# Altium PCB RobotCtrl_Core.PcbDoc
Units mil, origin at the board's own origin, x right, y up, seen from the top; angles counter-clockwise.
Board outline 1880 x 1545 mil, 4 copper layers (Top Layer, GND1, GND2, Bottom Layer), stack 23.756 mil thick; 48 components, 127 nets, 372 pads, 174 vias.
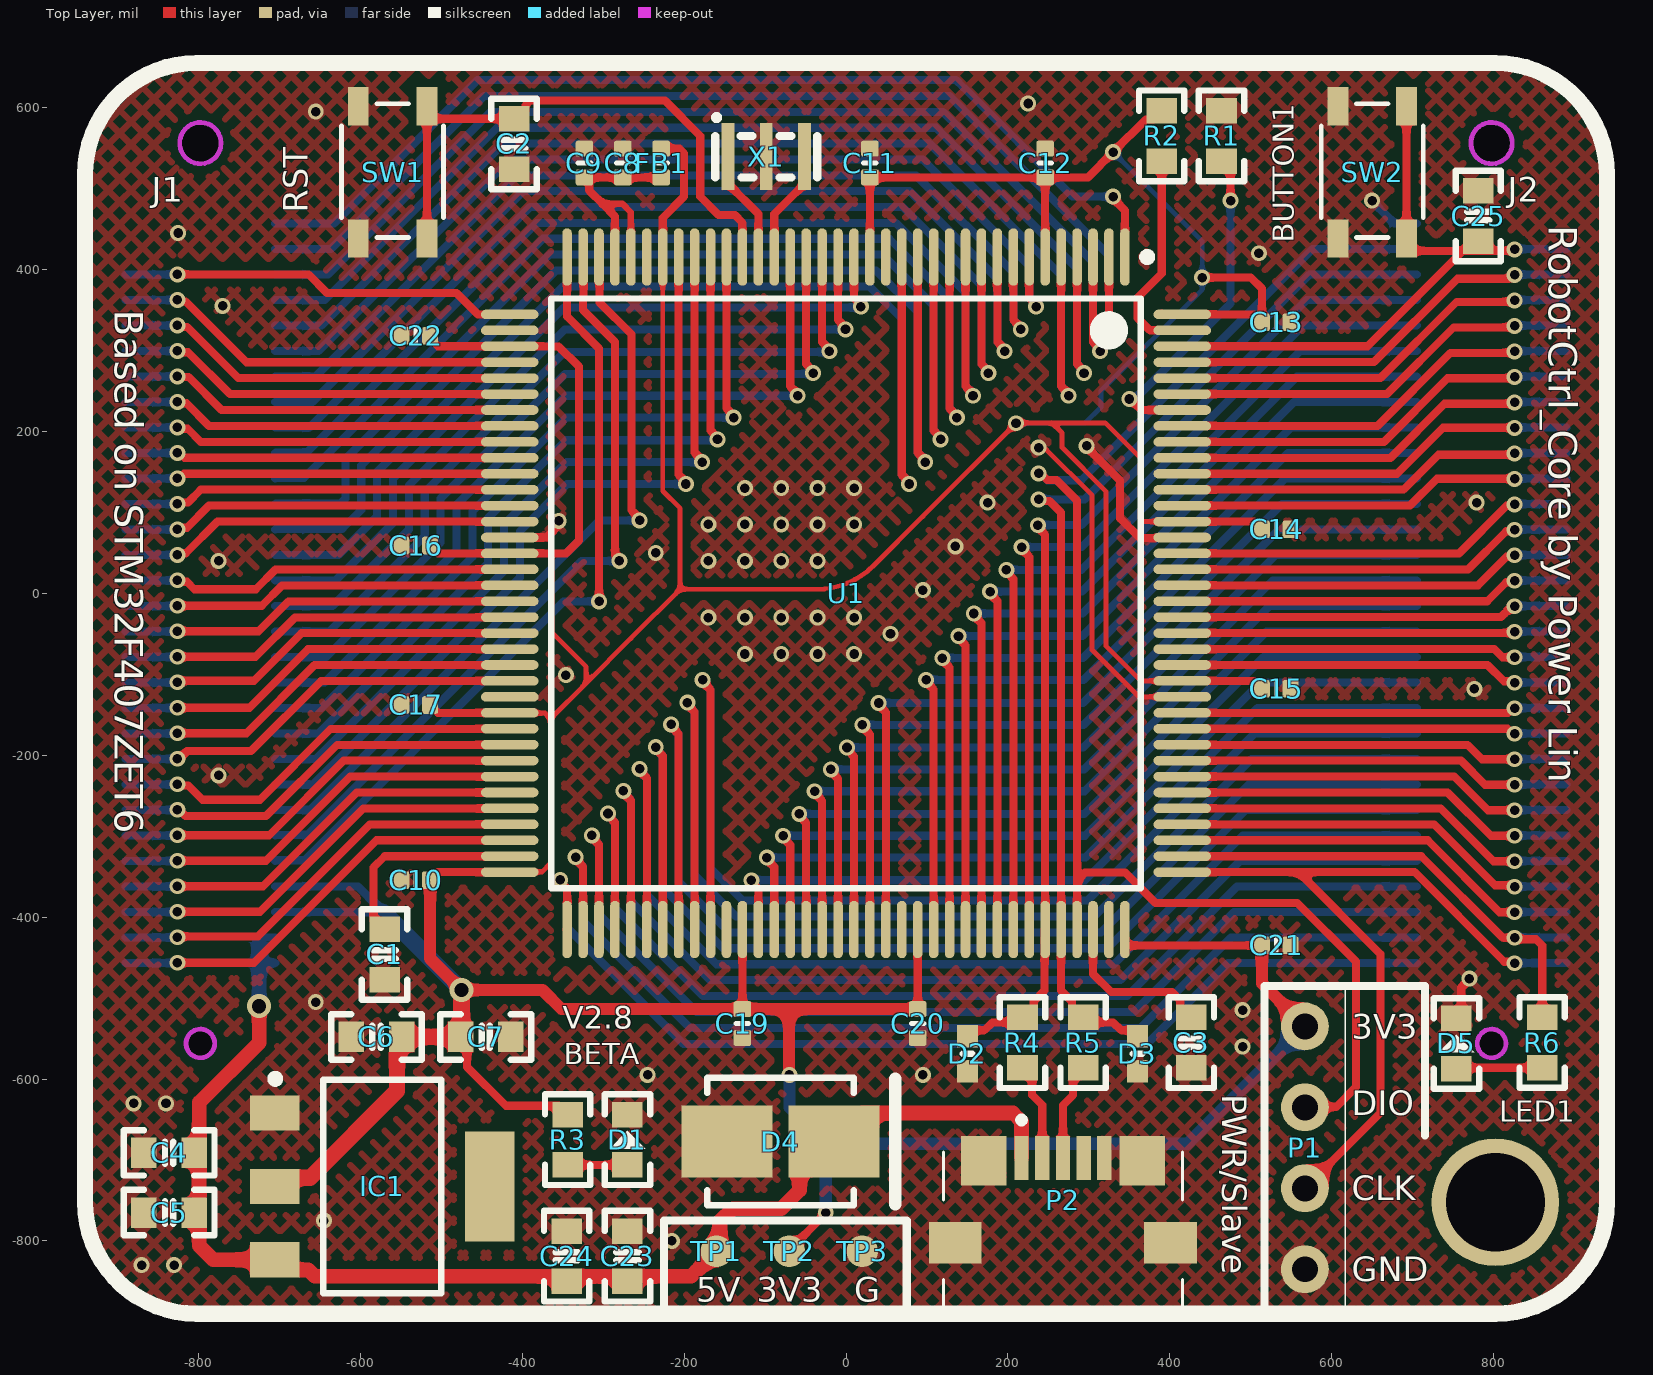
[diagram p0: Top Layer view]
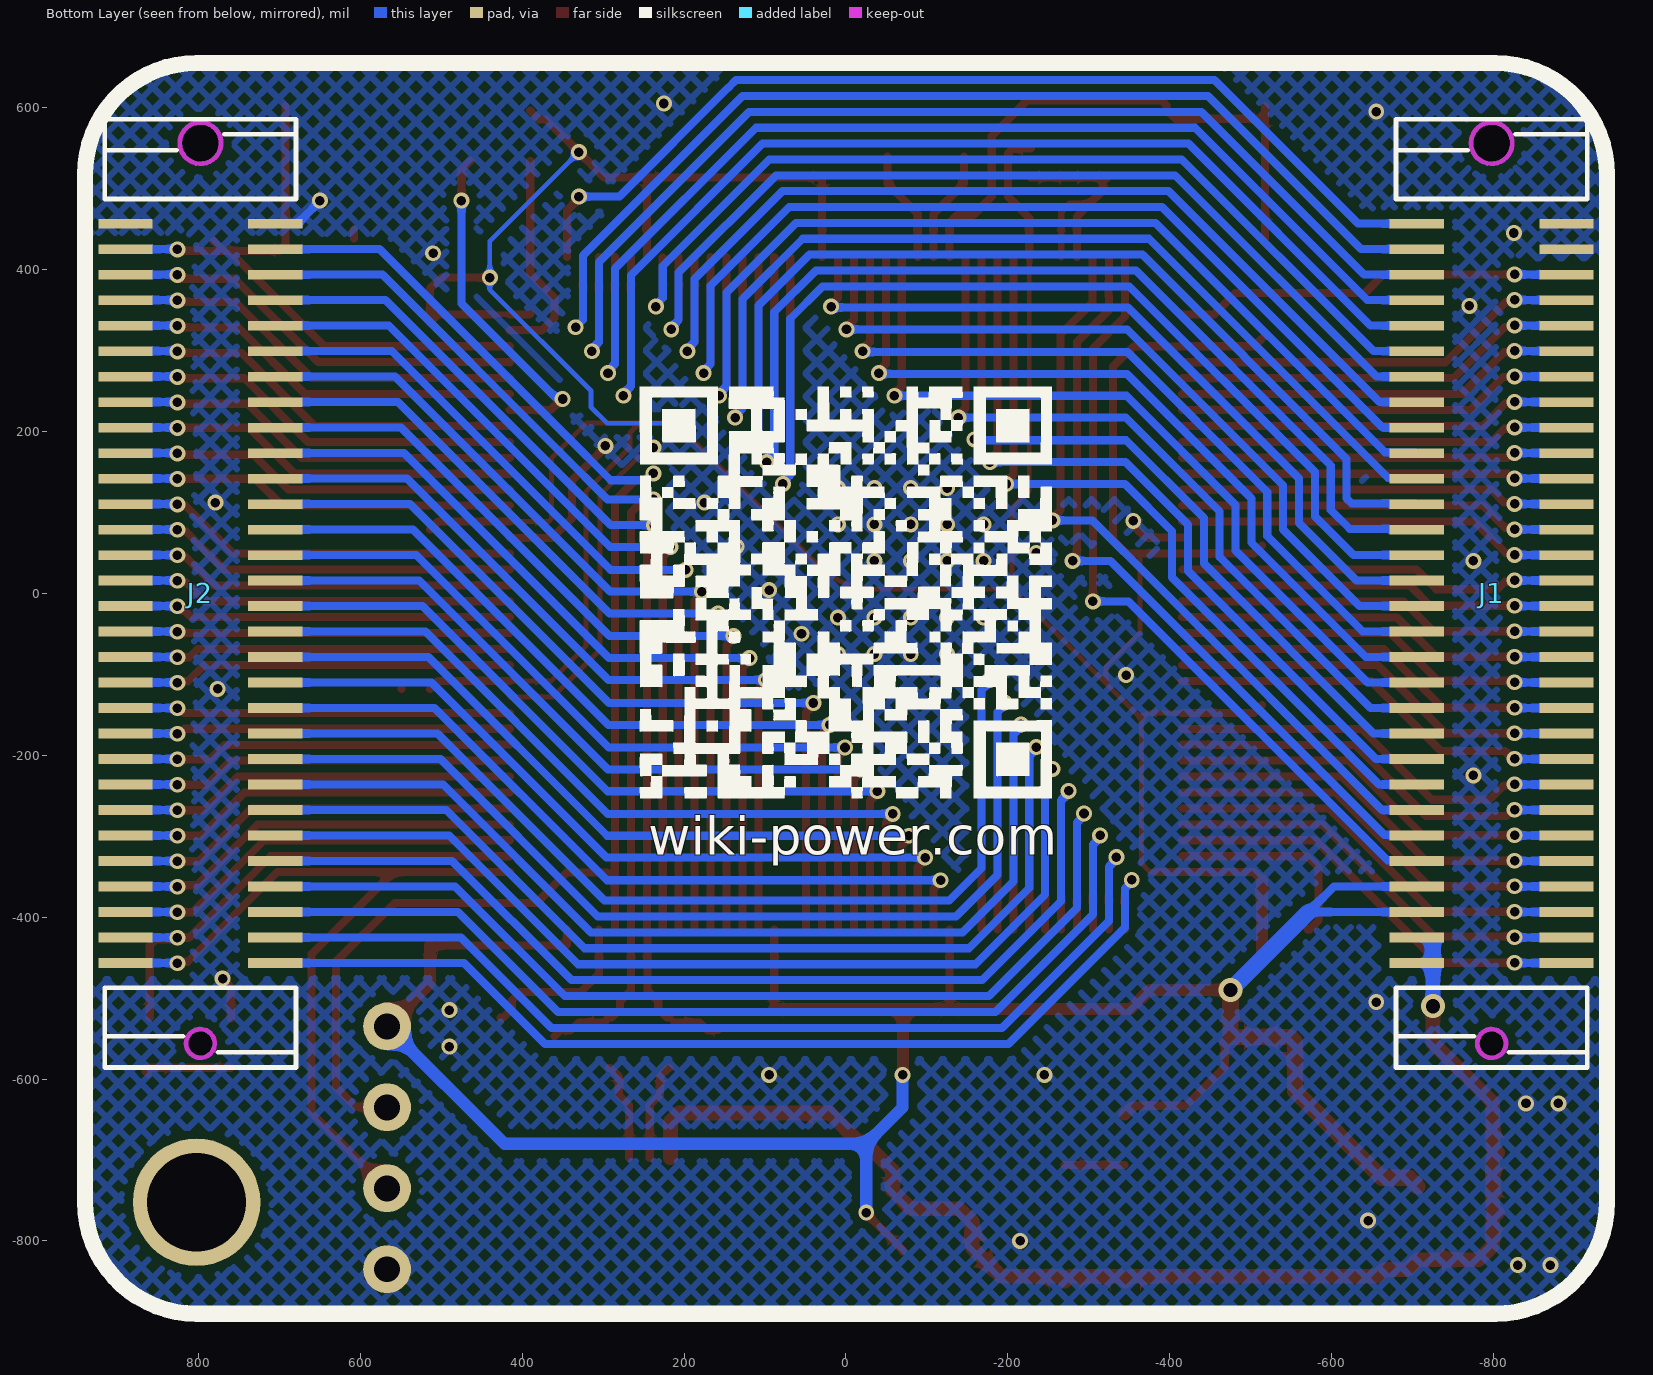
[diagram p1: Bottom Layer view, seen from below]
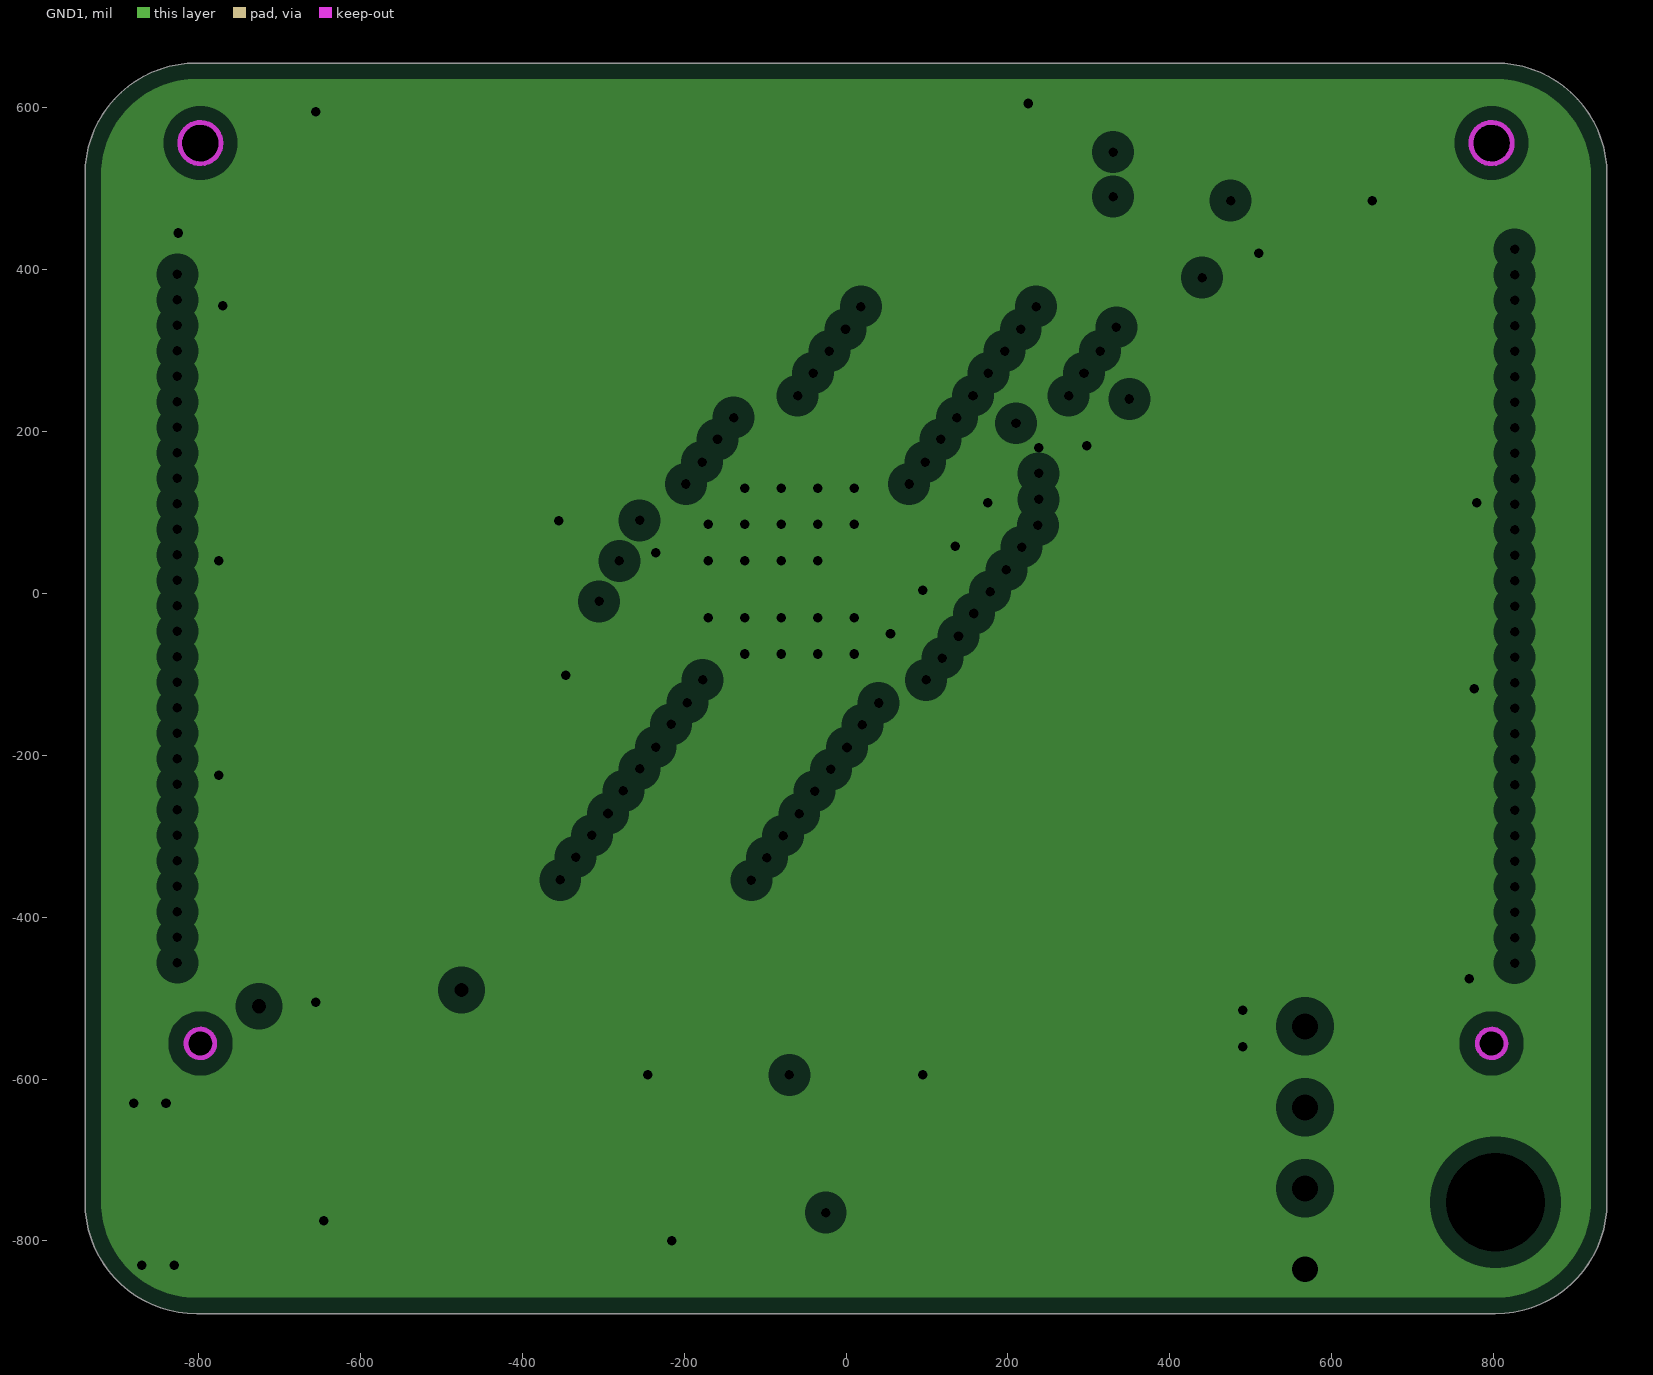
[diagram p2: GND1, clearances drawn from the general rule]
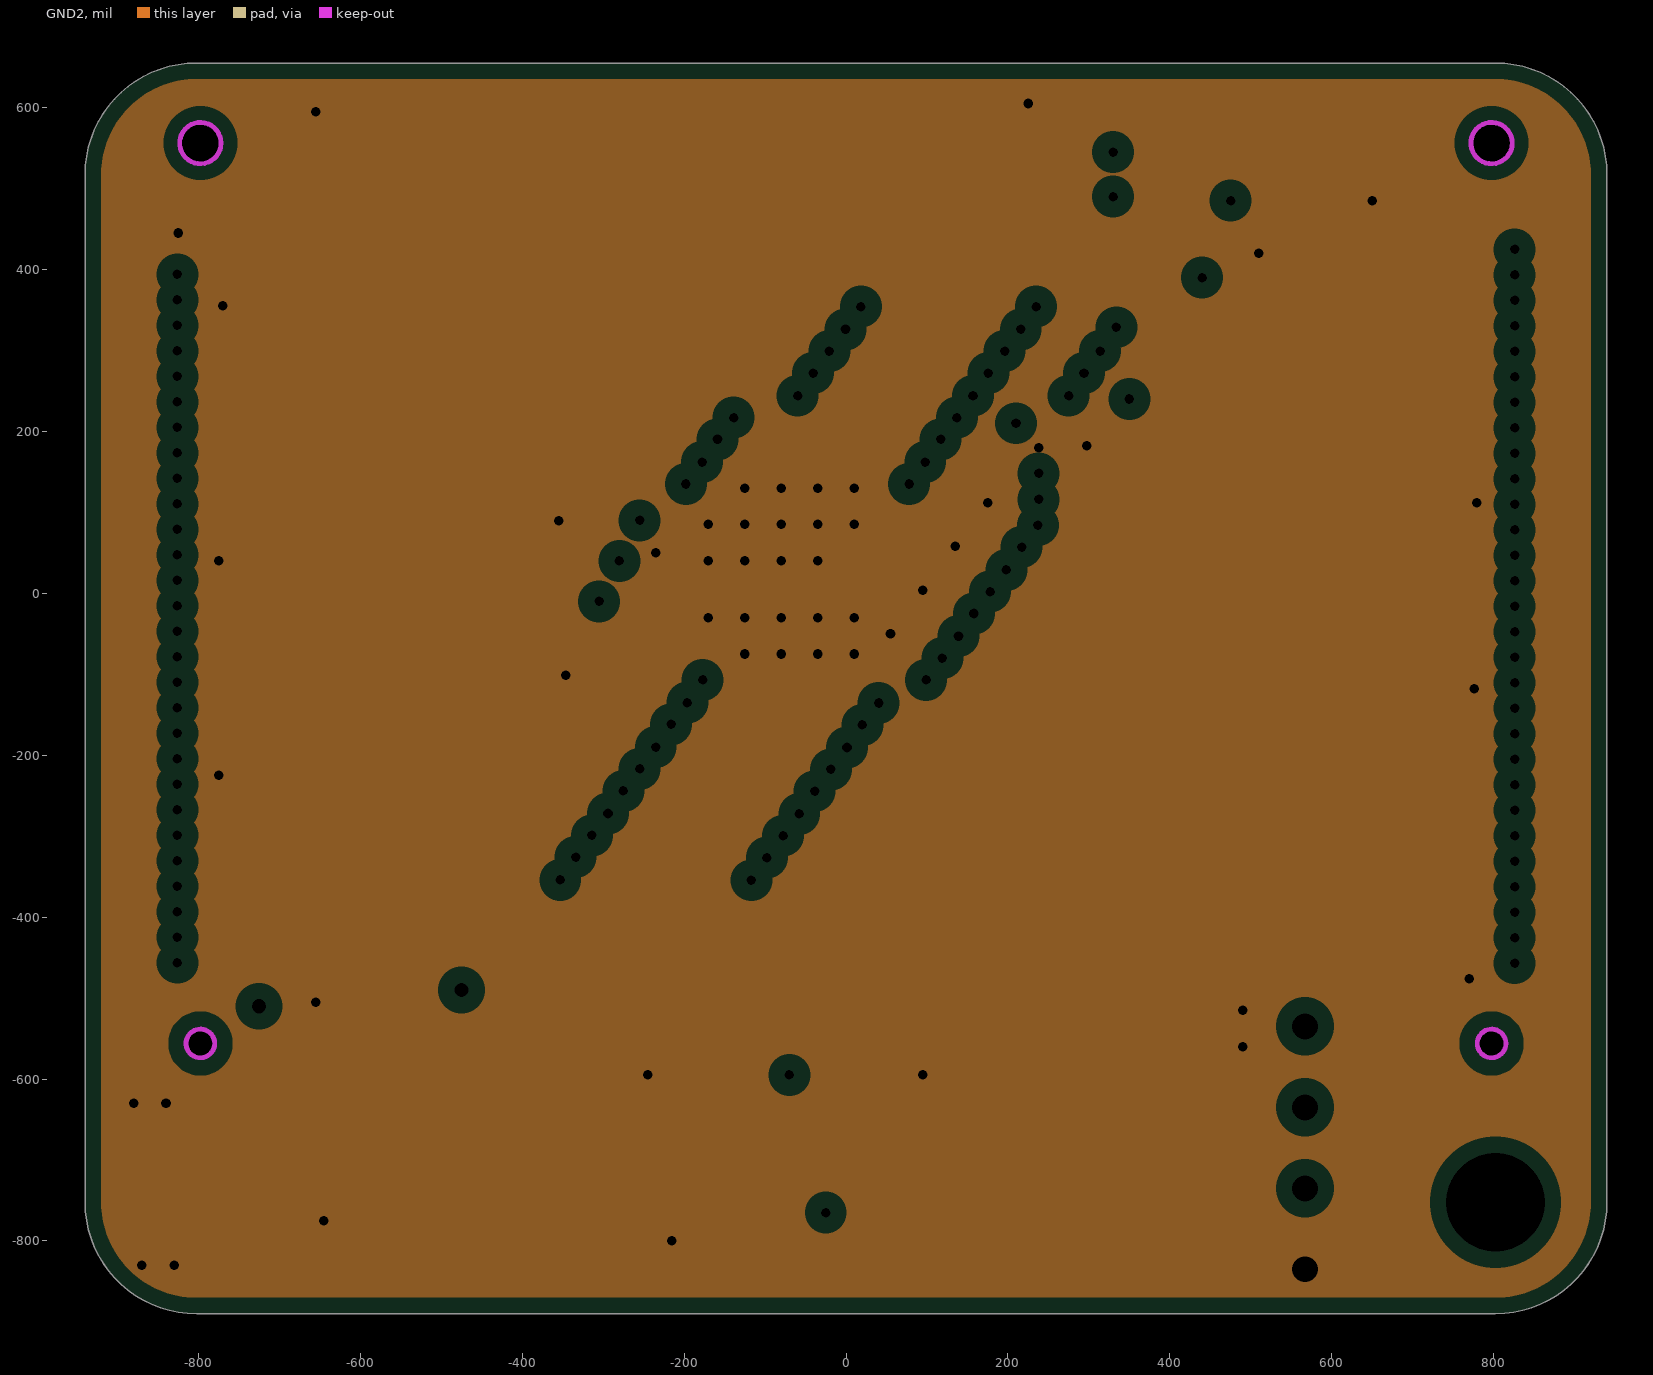
[diagram p3: GND2, clearances drawn from the general rule]
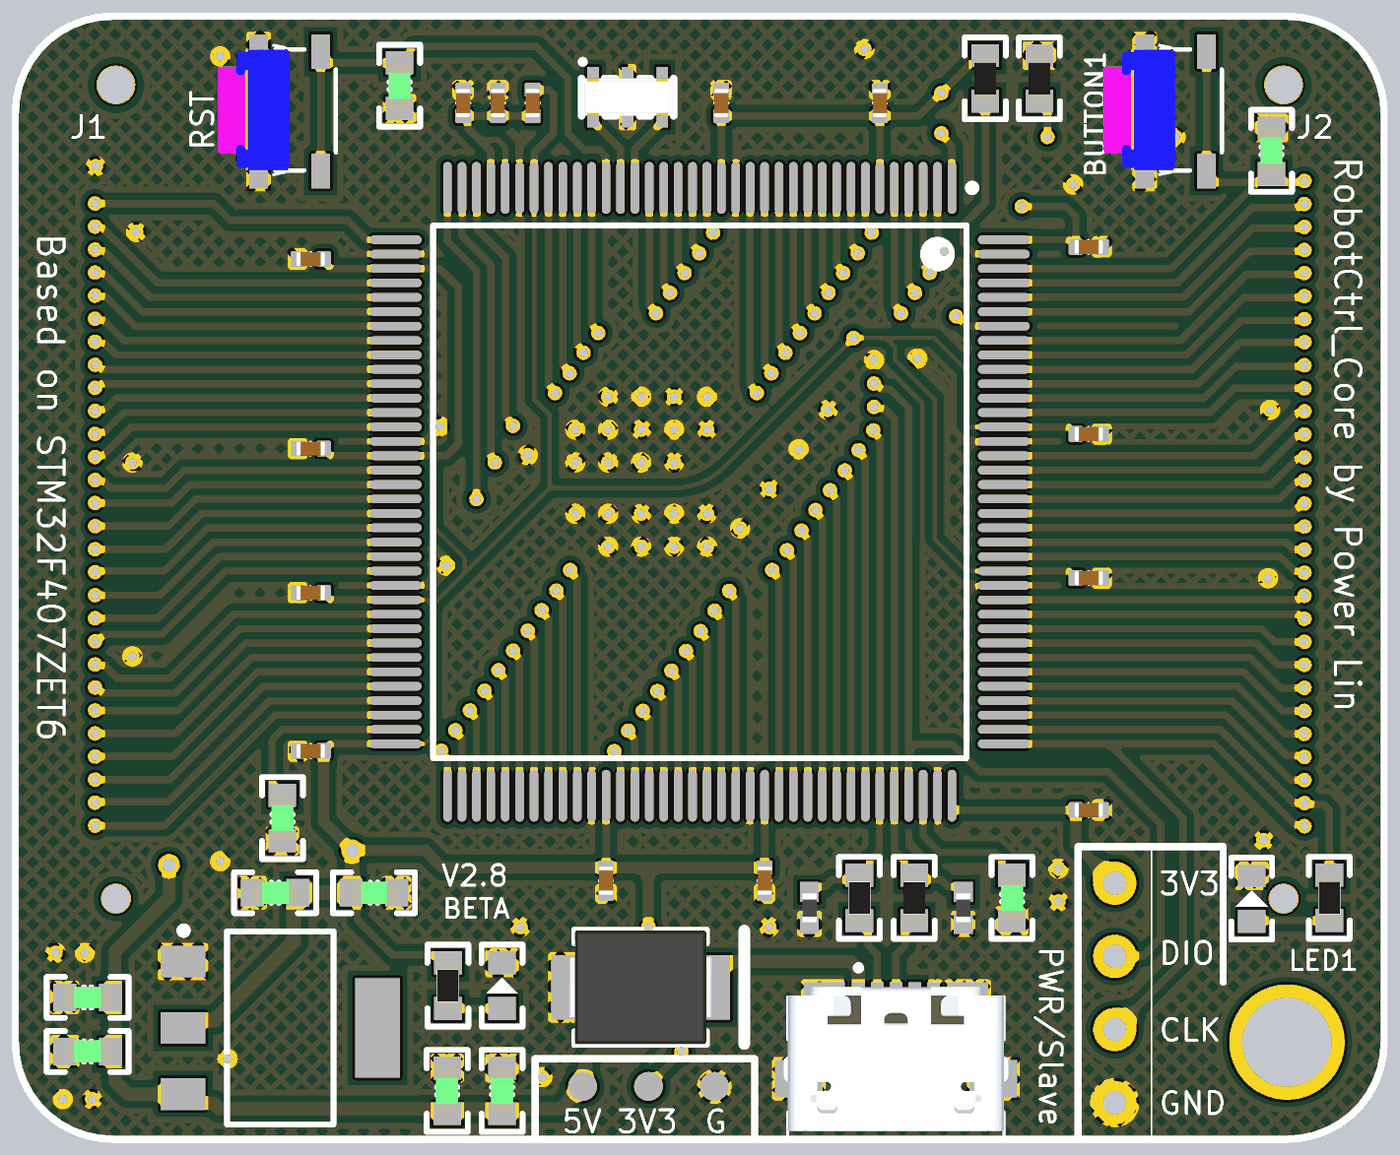
[diagram p4: 3D render of the assembled board from above, using the file's embedded part models]

## Layer stack, top to bottom
Top Solder: solder mask 0.4, Solder Resist, Dk 3.5
Top Layer: signal copper 1.4
Dielectric 2: prepreg 2.8, PP-006, Dk 4.1
GND1: plane copper 1.378, net GND
Dielectric 1: dielectric 12.6, FR-4, Dk 4.8
GND2: plane copper 1.378, net GND
Dielectric 3: prepreg 2.8, PP-006, Dk 4.1
Bottom Layer: signal copper 1.4
Bottom Solder: solder mask 0.4, Solder Resist, Dk 3.5

## Board outline
-802.2,-890 cw(c-802.2,-752.2) -940,-752.2 -940,517.2 cw(c-802.2,517.2) -802.2,655 802.2,655 cw(c802.2,517.2) 940,517.2 940,-752.2 cw(c802.2,-752.2) 802.2,-890
cut-out: 797.48,-575.79 cw(c797.48,-556.1) 777.8,-556.1 cw(c797.48,-556.1) 797.48,-536.42 cw(c797.48,-556.1) 817.17,-556.1 cw(c797.48,-556.1)
cut-out: -797.48,-575.79 cw(c-797.48,-556.1) -817.17,-556.1 cw(c-797.48,-556.1) -797.48,-536.42 cw(c-797.48,-556.1) -777.8,-556.1 cw(c-797.48,-556.1)
cut-out: 797.48,530.51 cw(c797.48,556.1) 771.89,556.1 cw(c797.48,556.1) 797.48,581.69 cw(c797.48,556.1) 823.07,556.1 cw(c797.48,556.1)
cut-out: -797.48,530.51 cw(c-797.48,556.1) -823.07,556.1 cw(c-797.48,556.1) -797.48,581.69 cw(c-797.48,556.1) -771.89,556.1 cw(c-797.48,556.1)

## Design rules (kind name [scope] priority, off if disabled: settings)
Clearance [All] p1: gap=10 ignorepadtopadclearanceinfootprint=FALSE except(0: Arc-Hole Track-Hole SMDPad-Hole THPad-Hole Via-Hole Fill-Hole Poly-Hole Region-Hole Text-Hole; 2: Arc-SMDPad Track-SMDPad SMDPad-SMDPad; 9.6: Arc-Arc Arc-Track Track-Track)
PlaneClearance [All] p1: clearance=20
PlaneConnect [All] p1: planeconnectstyle=Direct reliefexpansion=20 reliefentries=4 reliefconductorwidth=10 reliefairgap=10
PolygonConnect [All] p1: connectstyle=Direct reliefconductorwidth=10 reliefentries=4 polygonreliefangle="90 Angle" airgapwidth=10
RoutingVias [All] p1: holewidth=11.81 width=19.68 viastyle="Through Hole" minholewidth=11.81 minwidth=19.68 maxholewidth=11.81 maxwidth=19.68
SolderMaskExpansion [All] p1: expansion=4 istentingtop=FALSE
Width [All] p1: maxlimit=100 minlimit=6 preferedwidth=10
28 further rules are at their usual default settings.

## Components (designator, comment, footprint, x,y, rotation, side; value= is the part's Value field where it differs from the comment)
C1 "2.2uF" CAP-0603 -570,-446.1 r270 top
C2 "100nF" CAP-0603 -410,555 r90 top
C3 "2.2uF" CAP-0603 426.55,-555.1 r270 top
C4 "10uF" CAP-0603 -836.1,-691.12 r0 top
C5 "100nF" CAP-0603 -836.1,-765 r0 top
C6 "100nF" CAP-0603 -580,-547.99 r0 top
C7 "10uF" CAP-0603 -445,-547.99 r180 top
C8 "1uF" CAP-0402 -275.65,531.46 r270 top
C9 "100nF" CAP-0402 -323.06,531.46 r270 top
C10 "10uF" CAP-0402 -531.46,-354.28 r0 top
C11 "100nF" CAP-0402 29.53,531.46 r270 top
C12 "100nF" CAP-0402 246.06,531.46 r270 top
C13 "100nF" CAP-0402 531.46,334.7 r180 top
C14 "100nF" CAP-0402 531.46,79 r180 top
C15 "100nF" CAP-0402 531.46,-118 r180 top
C16 "100nF" CAP-0402 -531.46,59 r0 top
C17 "100nF" CAP-0402 -531.46,-138 r0 top
C19 "100nF" CAP-0402 -127.95,-531.46 r90 top
C20 "100nF" CAP-0402 88.58,-531.46 r90 top
C21 "100nF" CAP-0402 531.46,-435 r180 top
C22 "100nF" CAP-0402 -531.46,318 r0 top
C23 "10uF" CAP-0603 -270,-818.9 r270 top
C24 "100nF" CAP-0603 -345,-818.9 r270 top
C25 "100nF" CAP-0603 781,466 r270 top
D1 "RED" LED-0603 -270,-675 r90 top
D2 "PESD0402-140" D-0402 150,-568.78 r90 top
D3 "PESD0402-140" D-0402 360,-568.78 r90 top
D4 "SMBJ5.0CA" DO-214AA/SMB -80.94,-677.29 r180 top
D5 "RED" LED-0603 754,-556.1 r90 top
FB1 "120R@100MHz" CAP-0402 -228.23,531.46 r270 top
IC1 "AMS1117-3.3" SOT-223 -580,-756.7 r270 top
J1 "3710M060037G3FT01" 3710M060037G3FT01 -704.96,-456.69 r0 bottom locked
J2 "3710M060037G3FT01" 3710M060037G3FT01 890,-456.69 r0 bottom locked
P1 "HDR1x4_2.54" HDR1X4_2.54 566.91,-835 r180 top
P2 "MicroQTJ" USB-MICRO 268,-775.25 r0 top
R1 "10k" R-0603 463.88,565 r270 top
R2 "120R" R-0603 390,565 r270 top
R3 "4.7k" R-0603 -343.88,-675 r90 top
R4 "10R" R-0603 218,-555.1 r270 top
R5 "10R" R-0603 293,-555.1 r270 top
R6 "4.7k" R-0603 860,-555 r90 top
SW1 "KEY" KEY-4P-4.2*3.4*2.5 -560,520 r270 top
SW2 "KEY" KEY-4P-4.2*3.4*2.5 650,520 r270 top
TP1 "TestPoint" TestPoint -160,-812.71 r90 top
TP2 "TestPoint" TestPoint -70,-812.71 r90 top
TP3 "TestPoint" TestPoint 20,-812.71 r90 top
U1 "STM32F407ZET6" STM-LQFP144_N 0,0 r270 top locked
X1 "8MHz" SMD3213-3P -98.5,539.29 r0 top

## Footprints (in the part's own frame and the unit in brackets; to place one, negate y for a bottom-side part, rotate by r counter-clockwise, add the part's x,y. Pads: shape width x height; smd on the part's side, far side on the other; paste and mask are expansions set on the pad)
3710M060037G3FT01 [mm]
  rect 1.7x0.3 smd: 1(-4.7,0) 2(-4.7,-0.8) 3(-4.7,-1.6) 4(-4.7,-2.4) 5(-4.7,-3.2) 6(-4.7,-4) 7(-4.7,-4.8) 8(-4.7,-5.6) 9(-4.7,-6.4) 10(-4.7,-7.2) 11(-4.7,-8) 12(-4.7,-8.8) 13(-4.7,-9.6) 14(-4.7,-10.4) 15(-4.7,-11.2) 16(-4.7,-12) 17(-4.7,-12.8) 18(-4.7,-13.6) 19(-4.7,-14.4) 20(-4.7,-15.2) 21(-4.7,-16) 22(-4.7,-16.8) 23(-4.7,-17.6) 24(-4.7,-18.4) 25(-4.7,-19.2) 26(-4.7,-20) 27(-4.7,-20.8) 28(-4.7,-21.6) 29(-4.7,-22.4) 30(-4.7,-23.2) 31(0,-23.2) 32(0,-22.4) 33(0,-21.6) 34(0,-20.8) 35(0,-20) 36(0,-19.2) 37(0,-18.4) 38(0,-17.6) 39(0,-16.8) 40(0,-16) 41(0,-15.2) 42(0,-14.4) 43(0,-13.6) 44(0,-12.8) 45(0,-12) 46(0,-11.2) 47(0,-10.4) 48(0,-9.6) 49(0,-8.8) 50(0,-8) 51(0,-7.2) 52(0,-6.4) 53(0,-5.6) 54(0,-4.8) 55(0,-4) 56(0,-3.2) 57(0,-2.4) 58(0,-1.6) 59(0,-0.8) 60(0,0)
  Keep-Out Layer circle w0.152: c-2.35,-25.725 r0.65
  Keep-Out Layer circle w0.152: c-2.35,2.525 r0.45
  silkscreen extent -5.35,-26.47 0.65,3.27
CAP-0402 [mm]
  rrect25% 0.5x0.55 smd: 1(-0.45,0) 2(0.45,0)
  silkscreen extent 0,-0.2 0,0.2, body extent -0.5,-0.25 0.5,0.25, height 0.6
CAP-0603 [mm]
  rect 0.8x0.96 smd: 1(-0.79,0) 2(0.79,0)
  silkscreen extent -1.42,-0.71 1.42,0.71, body extent -0.76,-0.39 0.76,0.39, height 0.9
D-0402 [mm]
  rect 0.7x0.65 smd: 1(-0.55,0) 2(0.55,0)
  silkscreen extent 0,-0.15 0,0.15, body extent -0.5,-0.25 0.5,0.25, height 0.43
DO-214AA/SMB [mm]
  rect 2.85x2.25 smd: 1(1.675,0) 2(-1.675,0)
  silkscreen extent -3.6,-2 2.3,2, body extent -2.5,-1.97 2.5,1.97, height 2.44
HDR1X4_2.54 [mm]
  round 1.5 hole 0.813: 1(0,0) 2(0,-2.54) 3(0,-5.08) 4(0,-7.62)
  silkscreen extent -1.27,-8.89 1.27,1.27
KEY-4P-4.2*3.4*2.5 [mm] "SKRPABE010"
  rect 1.2x0.65 smd: 1(-2.075,1.075) 1(2.075,1.075) 2(-2.075,-1.075) 2(2.075,-1.075)
  silkscreen extent -2.15,-1.6 2.05,1.6, body extent -2.35,-1.6 2.25,1.6, height 2.5
LED-0603 [mm]
  rect 0.8x0.96 smd: 1(-0.79,0) 2(0.79,0)
  silkscreen extent -1.42,-0.71 1.42,0.71, body extent -0.81,-0.4 0.81,0.4, height 0.6
R-0603 [mm]
  rect 0.8x0.96 smd: 1(-0.79,0) 2(0.79,0)
  silkscreen extent -1.42,-0.71 1.42,0.71, body extent -0.76,-0.38 0.76,0.38, height 0.41
SMD3213-3P [mm]
  rect 0.4x2.1 smd: 1(-1.2,0) 2(0,0) 3(1.2,0)
  silkscreen extent -1.6,-0.65 1.6,1.27, body extent -1.6,-0.65 1.6,0.65, height 0.7
SOT-223 [mm]
  rect 1.1x1.55 smd: 1(-2.91,-3.197) 2(-0.61,-3.197) 3(1.69,-3.197)
  rect 3.45x1.55 smd: 4(-0.61,3.553)
  silkscreen extent -4.11,-3.3 2.74,2.03, body extent -3.88,-3.38 2.62,3.58, height 1.7
STM-LQFP144_N [mm] "Thin QFP, 144-Leads, Body 20x20mm, Pitch 0.5mm, IPC Medium Density"
  oval 1.8x0.3 smd: 1(-10.55,8.75) 2(-10.55,8.25) 3(-10.55,7.75) 4(-10.55,7.25) 5(-10.55,6.75) 6(-10.55,6.25) 7(-10.55,5.75) 8(-10.55,5.25) 9(-10.55,4.75) 10(-10.55,4.25) 11(-10.55,3.75) 12(-10.55,3.25) 13(-10.55,2.75) 14(-10.55,2.25) 15(-10.55,1.75) 16(-10.55,1.25) 17(-10.55,0.75) 18(-10.55,0.25) 19(-10.55,-0.25) 20(-10.55,-0.75) 21(-10.55,-1.25) 22(-10.55,-1.75) 23(-10.55,-2.25) 24(-10.55,-2.75) 25(-10.55,-3.25) 26(-10.55,-3.75) 27(-10.55,-4.25) 28(-10.55,-4.75) 29(-10.55,-5.25) 30(-10.55,-5.75) 31(-10.55,-6.25) 32(-10.55,-6.75) 33(-10.55,-7.25) 34(-10.55,-7.75) 35(-10.55,-8.25) 36(-10.55,-8.75) 73(10.55,-8.75) 74(10.55,-8.25) 75(10.55,-7.75) 76(10.55,-7.25) 77(10.55,-6.75) 78(10.55,-6.25) 79(10.55,-5.75) 80(10.55,-5.25) 81(10.55,-4.75) 82(10.55,-4.25) 83(10.55,-3.75) 84(10.55,-3.25) 85(10.55,-2.75) 86(10.55,-2.25) 87(10.55,-1.75) 88(10.55,-1.25) 89(10.55,-0.75) 90(10.55,-0.25) 91(10.55,0.25) 92(10.55,0.75) 93(10.55,1.25) 94(10.55,1.75) 95(10.55,2.25) 96(10.55,2.75) 97(10.55,3.25) 98(10.55,3.75) 99(10.55,4.25) 100(10.55,4.75) 101(10.55,5.25) 102(10.55,5.75) 103(10.55,6.25) 104(10.55,6.75) 105(10.55,7.25) 106(10.55,7.75) 107(10.55,8.25) 108(10.55,8.75)
  oval 0.3x1.8 smd: 37(-8.75,-10.55) 38(-8.25,-10.55) 39(-7.75,-10.55) 40(-7.25,-10.55) 41(-6.75,-10.55) 42(-6.25,-10.55) 43(-5.75,-10.55) 44(-5.25,-10.55) 45(-4.75,-10.55) 46(-4.25,-10.55) 47(-3.75,-10.55) 48(-3.25,-10.55) 49(-2.75,-10.55) 50(-2.25,-10.55) 51(-1.75,-10.55) 52(-1.25,-10.55) 53(-0.75,-10.55) 54(-0.25,-10.55) 55(0.25,-10.55) 56(0.75,-10.55) 57(1.25,-10.55) 58(1.75,-10.55) 59(2.25,-10.55) 60(2.75,-10.55) 61(3.25,-10.55) 62(3.75,-10.55) 63(4.25,-10.55) 64(4.75,-10.55) 65(5.25,-10.55) 66(5.75,-10.55) 67(6.25,-10.55) 68(6.75,-10.55) 69(7.25,-10.55) 70(7.75,-10.55) 71(8.25,-10.55) 72(8.75,-10.55) 109(8.75,10.55) 110(8.25,10.55) 111(7.75,10.55) 112(7.25,10.55) 113(6.75,10.55) 114(6.25,10.55) 115(5.75,10.55) 116(5.25,10.55) 117(4.75,10.55) 118(4.25,10.55) 119(3.75,10.55) 120(3.25,10.55) 121(2.75,10.55) 122(2.25,10.55) 123(1.75,10.55) 124(1.25,10.55) 125(0.75,10.55) 126(0.25,10.55) 127(-0.25,10.55) 128(-0.75,10.55) 129(-1.25,10.55) 130(-1.75,10.55) 131(-2.25,10.55) 132(-2.75,10.55) 133(-3.25,10.55) 134(-3.75,10.55) 135(-4.25,10.55) 136(-4.75,10.55) 137(-5.25,10.55) 138(-5.75,10.55) 139(-6.25,10.55) 140(-6.75,10.55) 141(-7.25,10.55) 142(-7.75,10.55) 143(-8.25,10.55) 144(-8.75,10.55)
  silkscreen extent -10.67,-9.25 9.25,9.58, body extent -10,-10 10,10, height 1.6
TestPoint [mm]
  round 1 smd: 1(0,0)
USB-MICRO [mm]
  rect 0.45x1.38 smd: 1(-1.3,1.975) 2(-0.65,1.975) 3(0,1.975) 4(0.65,1.975) 5(1.3,1.975)
  rect 1.65x1.3 smd: EH(-3.375,-0.685) EH(3.375,-0.685)
  rect 1.425x1.55 smd: EH(-2.487,1.89) EH(2.487,1.89)
  silkscreen extent -3.75,-2.84 3.75,3.26, body extent -3.9,-2.5 3.9,2.5, height 2.72

## Part data
C1 C2 C3 C4 C5 C6 C7 C8 C9 C10 C11 C12 C13 C14 C15 C16 C17 C19 C20 C21 C22 C23 C24 C25: library part CAP, "贴片电容", Package=0402, SuppliersPartNumber=C52923, ComponentLink1Description=供应商链接, ComponentLink1URL=http://www.szlcsc.com/product/details_53938.html, Supplier=LC
D1 D5: library part LED, "发光二极管", Package=0603, SuppliersPartNumber=C2290, ComponentLink1Description=供应商链接, ComponentLink1URL=http://www.szlcsc.com/product/details_2663.html, Supplier=LC
D2 D3: library part TVS_C
D4: library part TVS_C, "Brightking / MDD"
FB1: library part BEAD, "BLM15AG121SN1D", Package=0402, SuppliersPartNumber=C32041, ComponentLink1Description=供应商链接, ComponentLink1URL=http://www.szlcsc.com/product/details_33003.html, Supplier=LC
IC1: library part AMS1117, "AMS1117-3.3 1.0A", Manufacturer_Name=Nexperia, Manufacturer_Part_Number=SI2302DS, Mouser Part Number=N/A, RS Part Number=7983053P, Datasheet Link=https://assets.nexperia.com/documents/data-sheet/SI2302DS.pdf, Height=1.1mm, Mouser Price/Stock=https://www.mouser.com/Search/Refine.aspx?Keyword=N%2FA, RS Price/Stock=http://uk.rs-online.com/web/p/products/7983053P
J1 J2: library part 3710M/F, "B2B Connector", System=Connector
P1: "Header"
P2: library part USB_MICRO, "USB_MICRO"
R1 R2 R3 R4 R5 R6: library part RES, "贴片电阻", Package=0805, SuppliersPartNumber=C17798, Supplier=LC
SW1 SW2: "按键开关"
TP1 TP2 TP3: "测试点"
U1: "ARM Cortex-M4 32-bit MCU+FPU, 210 DMIPS, 512 kB Flash, 192 kB Internal RAM, 114 I/Os, 144-pin LQFP, -40 to 85 degC, Tray", I/Os (High Current)=114, Manufacturer=STMicroelectronics, Operating Frequency(F) (Processor speed) (MHz)=168, Supplier Part Number 1=497-11903-ND, Supply Voltage(Vcc) max (V)=3.6, Supply Voltage(Vcc) min (V)=1.8, ComponentLink1Description="Manufacturer URL", ComponentLink1URL=http://www.st.com/web/en/home.html, ComponentLink2Description=Datasheet, ComponentLink2URL=http://www.st.com/st-web-ui/static/active/en/resource/technical/document/datasheet/DM00037051.pdf, ComponentLink3Description="Package Specification", ComponentLink3URL=http://www.st.com/st-web-ui/static/active/en/resource/technical/document/datasheet/DM00037051.pdf, Core="ARM Cortex-M4", D/A Converter=2x12-bit, DatasheetVersion="Rev. 4", FLASH Size (Prog) (kB)=512, Internal RAM Size (kB)=192, Mounting Technology="Surface Mount", PackageDescription="144-Pin Low Profile Quad Flat Package, 20 x 20 mm Body, 0.5 mm Pitch", PackageReference=LQFP144, PackageVersion="Rev. 4, 06/2013", Packing=Tray, PartNumber=STM32F407ZET6, Supplier 1=Digi-Key, Supplier 2=Farnell, Supplier 3=Newark, Supplier 4=Newark, Supplier 5=Mouser, Supplier Part Number 2=2215229, Supplier Part Number 3=46W2203, Supplier Part Number 4=87T3795, Supplier Part Number 5=511-STM32F407ZET6
X1: library part XTAL, "CSTCE8M00G15C99-R0"

## Free pads (board coordinates)
  round 39.37 hole 39.37: 0(-797.48,-556.1) 0(797.48,-556.1)
  round 51.18 hole 51.18: 0(-797.48,556.1) 0(797.48,556.1)
  round 157.48 hole 122.05: 0(802.2,-752.2)

## Via types
v1: diameter 19.68, hole 11.81, Top Layer to Bottom Layer, 172 vias
v2: diameter 29.53, hole 17.72, Top Layer to Bottom Layer, 2 vias

## Nets (pads, with @x,y where several pads share a name; then routed paths per layer and width w, separated by ;. In a path a pad name is that pad's centre, name@x,y a point inside that pad or via, vN(x,y) a via of type N, cw(c..) or ccw(c..) an arc to the next point about the centre after c; other vN are vias at no path point)
GND: C1.2 C2.1 C3.2 C4.1 C5.1 C6.1 C7.1 C8.1 C9.1 C10.1 C11.1 C12.1 C13.1 C14.1 C15.1 C16.1 C17.1 C19.1 C20.1 C21.1 C22.1 C23.1 C24.1 C25.1 D1.2 D2.1 D3.1 D4.1 D5.2 IC1.1 J1.29 J1.30 J2.30 J2.31 P1.1 P2.5 P2.EH R1.1 SW1.2 SW2.2 TP3.1 U1.16 U1.31 U1.38 U1.51 U1.61 U1.83 U1.94 U1.107 U1.120 U1.130 X1.2 | length 817.3
  Top Layer w6: v1(-235,50) v1@-235,50.36 ; v1(238,180) 240.62,177.38 247.51,177.38 304,120.89 304,-70.06 361.89,-127.95 U1.120
  Top Layer w10: U1.51 -369.81,68.9 -356.7,82.01 -356.7,87.59 v1(-354.84,89.44) ; v1(297.15,182.15) 297.15,180.71 338.6,139.26 338.6,92.61 363.07,68.13 414.59,68.13 U1.130 ; C15.1 C15.1@549.25,-118.08 ; SW2.2@607.68,438.31 SW2.2@607.68,449.13 ; v1@648.15,483.15 v1(650,485) ; D5.2@760,-525 760,-486.8 770,-476.8 v1(770,-476.1) ; v1@776.22,-118.08 v1(776.3,-118.16)
  Bottom Layer w10: v1(650,485) 650,484.09 677.4,456.69 J2.30
  other v1: -870,-830 -830,-830 -215,-800 -645,-775 -880,-630 -840,-630 -245,-595 95,-595 490,-560 490,-515 -655,-505 -775,-225 -346,-101 -125,-75 -80,-75 -35,-75 10,-75 55,-50 -170,-30 -125,-30 -80,-30 -35,-30 10,-30 95,4 -775,40 -170,40 -125,40 -80,40 -35,40 135,58 -170,85 -125,85 -80,85 -35,85 10,85 175,112 779,112 -125,130 -80,130 -35,130 10,130 -770,355 510,420 -825,445 -655,595 225,605
NetC1_1: C1.1 U1.71 | length 258.1
  Top Layer w10: C1.1 -573.15,-415 -583.9,-404.25 -583.9,-338.9 -569.8,-324.8 U1.71
NetC2_2: C2.2 SW1.1 U1.25 | length 717.9
  Top Layer w10: SW1.1@-517.68,438.31 SW1.1@-517.68,593.9 ; SW1.1@-517.68,601.69 SW1.1@-517.68,593.9 ; U1.25 -127.95,445.37 -128.3,445.72 -128.3,458.3 -137.29,467.29 -157.29,467.29 -180,490 -180,565 -223.48,608.48 -390.24,608.48 -396.1,602.62 -396.1,596.85 -406.85,586.1 -509.88,586.1 SW1.1@-517.68,593.9
NetC3_1: C3.1 U1.106 | length 204.7
  Top Layer w10: U1.106 305.12,-470.12 327.66,-492.66 402.66,-492.66 412.66,-502.66 412.66,-513.25 423.4,-524 C3.1
NetD1_A: D1.1 R3.1 | length 73.9
  Top Layer w10: R3.1 D1.1
NetD5_A: D5.1 R6.1 | length 113.6
  Top Layer w10: D5.1@760,-586.1 R6.1 865,-586.1 865,-590.47 R6.1@861.99,-593.49
NetP2_2: P2.2 R4.2 | length 122.1
  Top Layer w10: R4.2 219.25,-586.2 230,-596.95 230,-619.81 242.41,-632.22 P2.2
NetP2_3: P2.3 R5.2 | length 122.1
  Top Layer w10: P2.3 268,-632.41 280.41,-620 280.41,-596.95 291.16,-586.2 R5.2@292.41,-586.2
NetR1_2: R1.2 U1.138 | length 425.5
  Top Layer w10: v1(350,240) 351.3,240 364.92,226.38 U1.138 ; R1.2 464.25,533.9 475,523.15 v1(475,485)
  Bottom Layer w10: v1(350,240) 351.85,241.85 358.74,241.85 475,358.11 v1(475,485)
NetR2_2: R2.2 U1.143 | length 268
  Top Layer w10: R2.2 390,395 360,365 360,340 374.85,325.15 415.01,325.15 U1.143
NetU1_23: U1.23 X1.3 | length 139.5
  Top Layer w10: U1.23 -88.58,468.35 -51.11,505.82 X1.3@-51.11,539.29
NetU1_24: U1.24 X1.1 | length 139.5
  Top Layer w10: X1.1 -145.74,505.82 -108.27,468.35 U1.24
PA0: J1.54 U1.34 | length 944.2
  Top Layer w10: U1.34 -304.35,414.59 -304.35,359.35 -265,320 -265,102.62 -255,92.62 v1(-255,90)
  Bottom Layer w10: J1.54 -662.28,-267.72 -383.2,11.36 -304.56,90 v1(-255,90)
PA1: J1.55 U1.35 | length 960
  Top Layer w10: U1.35 -324.8,386.17 -324.04,385.41 -324.04,367.13 -324.8,366.37 -324.8,349.8 -285.4,310.4 -285.4,48.02 -280,42.62 v1(-280,40)
  Bottom Layer w10: J1.55 -704.12,-298.37 -665.22,-298.37 -326.84,40 v1(-280,40)
PA2: J1.56 U1.36 | length 974.5
  Top Layer w10: U1.36 -344.4,415.27 -344.4,341.68 -305,302.28 v1(-305,-10)
  Bottom Layer w10: J1.56 -704.06,-329.8 -668.93,-329.8 -349.13,-10 v1(-305,-10)
PA3: J1.28 U1.37 | length 494.9
  Top Layer w10: v1(-826,394.01) -664.01,394.01 -641,371 -481,371 -454.49,344.49 U1.37
  Bottom Layer w10: J1.28 v1@-826.31,393.7
PA4: J1.27 U1.40 | length 506.3
  Top Layer w10: v1(-826,362.51) -824.15,360.66 -815.66,360.66 -740.43,285.43 U1.40
  Bottom Layer w10: J1.27 v1@-826.31,362.2
PA5: J1.26 U1.41 | length 501.4
  Top Layer w10: v1(-826,331.02) -824.15,329.16 -814.16,329.16 -750.75,265.75 U1.41
  Bottom Layer w10: J1.26 v1@-826.31,330.71
PA6: J1.25 U1.42 | length 496.5
  Top Layer w10: v1(-826,299.52) -824.17,297.69 -812.69,297.69 -761.06,246.06 U1.42
  Bottom Layer w10: J1.25 v1@-826.31,299.21
PA7: J1.24 U1.43 | length 491.6
  Top Layer w10: v1(-826,268.02) -824.92,266.95 -811.95,266.95 -771.38,226.38 U1.43
  Bottom Layer w10: J1.24 v1@-826.31,267.72
PA8: J2.24 U1.100 | length 1058.1
  Top Layer w10: v1(178,2) 178,-0.62 187.01,-9.63 U1.100
  Bottom Layer w10: v1(178,2) 291.59,2 557.31,267.72 J2.24
PA9: J2.25 U1.101 | length 1066.8
  Top Layer w10: v1(198,29) 198,26.38 206.69,17.69 U1.101
  Bottom Layer w10: v1(198,29) 290.87,29 561.09,299.21 J2.25
PA10: J2.26 U1.102 | length 1077.6
  Top Layer w10: v1(217,57) 217,54.38 226.38,45 U1.102
  Bottom Layer w10: v1(217,57) 291.15,57 564.86,330.71 J2.26
PA11: D2.2 J2.27 R4.1 U1.103 | length 1266.2
  Top Layer w10: D2.2@158.46,-539.67 171.33,-539.67 181,-530 R4.1@212,-530 ; R4.1 221.15,-524 231.9,-513.25 231.9,-504.1 245.25,-490.75 U1.103@245.25,-415.35 ; v1(237,84) 237,81.38 246.06,72.32 U1.103 246.06,-415.87 U1.103@246.11,-415.82
  Bottom Layer w10: v1(237,84) 237.3,84.3 290.74,84.3 568.64,362.2 J2.27
PA12: D3.2 J2.28 R5.1 U1.104 | length 1329.9
  Top Layer w10: v1(238,116) 239.85,114.15 251.23,114.15 265.75,99.63 U1.104 265.75,-490.75 279.1,-504.1 279.1,-513.25 289.85,-524 R5.1 299,-530 330,-530 339.67,-539.67 352.54,-539.67 D3.2
  Bottom Layer w10: v1(238,116) 294.72,116 353.52,174.8 572.42,393.7 J2.28
PA13: J2.29 P1.3 U1.105 | length 1802.5
  Top Layer w10: v1(238,148) 240.62,148 247.78,140.84 247.86,140.84 248.7,140 260,140 285.43,114.57 285.43,-354.57 ; U1.105 285.43,-354.57 ; P1.3 567.49,-634.42 605.58,-634.42 630,-610 630,-455 557.42,-382.42 382.42,-382.42 345,-345 295,-345 285.43,-354.57
  Bottom Layer w10: v1(238,148) 240.27,148 248.7,139.57 290.57,139.57 345.4,194.4 540.5,389.5 576.2,425.2 J2.29
PA14: J2.60 P1.2 U1.109 | length 994.5
  Top Layer w10: U1.109 558.92,-344.49 ; P1.2 660,-641.91 660,-445.57 558.92,-344.49 ; v1@824.15,-458.85 v1(826,-457) 824.15,-455.15 813.15,-455.15 702.49,-344.49 558.92,-344.49
  Bottom Layer w10: v1@826.31,-456.69 J2.60
PA15: J2.59 R6.2 U1.110 | length 642.9
  Top Layer w10: U1.110 415.44,-324.89 710.61,-324.89 811.04,-425.33 825.82,-425.33 v1(826,-425.5) 827.85,-427.36 852.36,-427.36 860,-435 R6.2
  Bottom Layer w10: v1@826.31,-425.2 J2.59
PB0: J1.21 U1.46 | length 476.9
  Top Layer w10: v1(-826,173.54) -823.38,173.54 -817.25,167.41 -415.44,167.41 U1.46
  Bottom Layer w10: J1.21 v1@-826.31,173.23
PB1: J1.20 U1.47 | length 476.1
  Top Layer w10: v1@-825.59,142.45 -822.97,142.45 -817.78,147.64 U1.47
  Bottom Layer w10: J1.20 v1@-826.31,141.73
  other v1: -826,142.04
PB2: J1.19 U1.48 | length 481.5
  Top Layer w10: v1(-826,110.54) -824.21,112.34 -812.66,112.34 -797.05,127.95 U1.48
  Bottom Layer w10: J1.19 v1@-826.31,110.24
PB3: J2.40 U1.133 | length 493
  Top Layer w10: U1.133 688.7,127.95 731.82,171.07 824.15,171.07 v1(826,172.92)
  Bottom Layer w10: v1@826.31,173.23 J2.40
PB4: J2.39 U1.134 | length 497.9
  Top Layer w10: U1.134 680.67,147.64 737.45,204.42 v1(826,204.42)
  Bottom Layer w10: v1@826.31,204.72 J2.39
PB5: J2.38 U1.135 | length 502.7
  Top Layer w10: U1.135 672.63,167.32 739.37,234.06 824.15,234.06 v1(826,235.91)
  Bottom Layer w10: v1@826.31,236.22 J2.38
PB6: J2.37 U1.136 | length 507.6
  Top Layer w10: U1.136 664.6,187.01 743.15,265.56 824.15,265.56 v1(826,267.41)
  Bottom Layer w10: v1@826.31,267.72 J2.37
PB7: J2.36 U1.137 | length 512.5
  Top Layer w10: U1.137 656.57,206.69 746.93,297.05 824.15,297.05 v1(826,298.91)
  Bottom Layer w10: v1@826.31,299.21 J2.36
PB8: J2.35 U1.139 | length 509.3
  Top Layer w10: U1.139 U1.139 668.3,246.15 750.7,328.55 824.15,328.55 v1(826,330.4)
  Bottom Layer w10: v1@826.31,330.71 J2.35
PB9: J2.34 U1.140 | length 514.2
  Top Layer w10: U1.140 445.55,265.75 445.72,265.92 660.36,265.92 754.48,360.04 824.15,360.04 v1(826,361.9)
  Bottom Layer w10: v1@826.31,362.2 J2.34
PB10: J1.2 U1.69 | length 532.1
  Top Layer w10: v1(-826,-424.89) -824.96,-423.85 -726.56,-423.85 -588.24,-285.52 -415.44,-285.52 U1.69
  Bottom Layer w10: J1.2 v1@-826.31,-425.2
PB11: J1.1 U1.70 | length 537
  Top Layer w10: v1(-826,-456.39) -731.39,-456.39 -580.12,-305.12 U1.70
  Bottom Layer w10: J1.1 v1@-826.31,-456.69
PB12: J2.1 U1.73 | length 1278
  Top Layer w10: v1(-353,-354) -353,-356.19 -344.49,-364.7 -344.49,-414.84 U1.73@-345,-415.35
  Bottom Layer w10: v1(-353,-354) -353,-356.19 -344.49,-364.7 -344.49,-413.06 -200.91,-556.64 371.91,-556.64 471.86,-456.69 J2.1
PB13: J2.2 U1.74 | length 1306.6
  Top Layer w10: v1(-334,-326) -334,-328.62 -324.8,-337.82 U1.74
  Bottom Layer w10: v1(-334,-326) -334,-328.62 -324.8,-337.82 -324.8,-404.91 -192.76,-536.95 363.76,-536.95 475.51,-425.2 J2.2
PB14: J2.3 U1.75 | length 1332.6
  Top Layer w10: v1(-314,-299) -314,-301.62 -305.12,-310.5 U1.75
  Bottom Layer w10: v1(-314,-299) -314,-301.62 -305.12,-310.5 -305.12,-396.75 -184.61,-517.26 355.61,-517.26 479.17,-393.7 J2.3
PB15: J2.4 U1.76 | length 1358.7
  Top Layer w10: v1(-294,-272) -294,-274.62 -285.43,-283.19 U1.76
  Bottom Layer w10: v1(-294,-272) -294,-274.62 -285.43,-283.19 -285.43,-388.6 -176.45,-497.58 347.45,-497.58 482.83,-362.2 J2.4
PC0: J1.50 U1.26 | length 949.9
  Top Layer w10: U1.26 -147.64,228.56 -138.7,219.62 v1(-138.7,217)
  Bottom Layer w10: J1.50 -648.01,-141.73 -461.6,44.68 -461.6,100.97 -345.57,217 v1(-138.7,217)
PC1: J1.51 U1.27 | length 959.2
  Top Layer w10: U1.27 -167.32,201.24 -158.7,192.62 v1(-158.7,190)
  Bottom Layer w10: J1.51 -651.79,-173.23 -442,36.56 -442,92.86 -345.86,189 v1@-157.7,189
PC2: J1.52 U1.28 | length 969.8
  Top Layer w10: U1.28 -187.01,173.93 -177.7,164.62 v1(-177.7,162)
  Bottom Layer w10: J1.52 -654.72,-204.72 -422.4,27.6 -422.4,84.74 -345.14,162 v1(-177.7,162)
PC3: J1.53 U1.29 | length 978.6
  Top Layer w10: U1.29 -206.69,146.61 -197.7,137.62 v1(-197.7,135)
  Bottom Layer w10: J1.53 -658.5,-236.22 -402.8,19.48 -402.8,76.62 -344.42,135 v1(-197.7,135)
PC4: J1.23 U1.44 | length 486.7
  Top Layer w10: v1(-826,236.53) -824.15,234.67 -814.67,234.67 -786.69,206.69 U1.44
  Bottom Layer w10: J1.23 v1@-826.31,236.22
PC5: J1.22 U1.45 | length 481.8
  Top Layer w10: v1(-826,205.03) -824.15,203.18 -813.18,203.18 -797.01,187.01 U1.45
  Bottom Layer w10: J1.22 v1@-826.31,204.72
PC6: J2.20 U1.96 | length 1021.2
  Top Layer w10: v1(99,-107) 99,-109.62 108.27,-118.89 U1.96
  Bottom Layer w10: v1(99,-107) 293.47,-107 542.2,141.73 J2.20
PC7: J2.21 U1.97 | length 1030.5
  Top Layer w10: v1(119,-80) 119,-82.62 127.95,-91.57 U1.97 127.95,-415.87 U1.97@128,-415.82
  Bottom Layer w10: v1(119,-80) 292.75,-80 545.98,173.23 J2.21
PC8: J2.22 U1.98 | length 1039.2
  Top Layer w10: v1(139,-53) 139,-55.62 147.64,-64.26 U1.98 147.64,-415.87 U1.98@147.68,-415.82
  Bottom Layer w10: v1(139,-53) 292.03,-53 549.75,204.72 J2.22
PC9: J2.23 U1.99 | length 1049.4
  Top Layer w10: v1(158,-25) 158,-27.62 167.32,-36.94 U1.99
  Bottom Layer w10: v1(158,-25) 292.31,-25 553.53,236.22 J2.23
PC10: J2.58 U1.111 | length 511.2
  Top Layer w10: U1.111 718.56,-305.12 807.44,-394.01 v1(826,-394.01)
  Bottom Layer w10: v1@826.31,-393.7 J2.58
PC11: J2.57 U1.112 | length 506.3
  Top Layer w10: U1.112 415.44,-285.52 726.67,-285.52 801.81,-360.66 824.15,-360.66 v1(826,-362.51)
  Bottom Layer w10: v1@826.31,-362.2 J2.57
PC12: J2.56 U1.113 | length 504
  Top Layer w10: U1.113 734.62,-265.75 799.89,-331.02 v1(826,-331.02) v1@824.15,-329.16
  Bottom Layer w10: v1@826.31,-330.71 J2.56
PC13: J1.36 U1.7 | length 1197.7
  Top Layer w10: U1.7@226.38,414.84 226.38,364.7 v1@234.89,356.19
  Bottom Layer w10: J1.36 -651.42,299.21 -414.75,535.89 94.83,535.89 226.38,404.33 226.38,364.7 v1@234.89,356.19
  other v1: 234.89,354
PC14: J1.37 U1.8 | length 1231.5
  Top Layer w10: U1.8 206.69,337.82 215.89,328.62 v1(215.89,326)
  Bottom Layer w10: J1.37 -655.2,267.72 -406.63,516.28 86.59,516.28 206.69,396.18 206.69,337.82 215.89,328.62 v1(215.89,326)
PC15: J1.38 U1.9 | length 1257.6
  Top Layer w10: U1.9 187.01,310.5 195.89,301.62 v1(195.89,299)
  Bottom Layer w10: J1.38 -658.98,236.22 -398.51,496.68 78.35,496.68 187.01,388.02 ; 187.01,388.03 187.01,310.5 195.89,301.62 v1(195.89,299)
PD0: J2.55 U1.114 | length 499.1
  Top Layer w10: U1.114 743.06,-246.06 796.52,-299.52 v1(826,-299.52) v1@824.15,-297.67
  Bottom Layer w10: v1@826.31,-299.21 J2.55
PD1: J2.54 U1.115 | length 494.2
  Top Layer w10: U1.115 751.38,-226.38 793.02,-268.02 v1(826,-268.02) v1@824.15,-266.17
  Bottom Layer w10: v1@826.31,-267.72 J2.54
PD2: J2.53 U1.116 | length 489.3
  Top Layer w10: U1.116 415.44,-206.78 759.5,-206.78 789.25,-236.53 v1(826,-236.53) v1@824.15,-234.67
  Bottom Layer w10: v1@826.31,-236.22 J2.53
PD3: J2.52 U1.117 | length 481.8
  Top Layer w10: U1.117 445.55,-187.01 445.72,-187.18 767.62,-187.18 785.47,-205.03 v1(826,-205.03)
  Bottom Layer w10: v1@826.31,-204.72 J2.52
PD4: J2.51 U1.118 | length 476.9
  Top Layer w10: U1.118 817.17,-167.32 823.38,-173.54 v1(826,-173.54)
  Bottom Layer w10: v1@826.31,-173.23 J2.51
PD5: J2.50 U1.119 | length 476.7
  Top Layer w10: U1.119 817.78,-147.64 823.38,-142.04 v1(826,-142.04)
  Bottom Layer w10: v1@826.31,-141.73 J2.50
PD6: J2.49 U1.122 | length 483.4
  Top Layer w10: U1.122 792.58,-88.58 812.71,-108.71 824.16,-108.71 v1(826,-110.54)
  Bottom Layer w10: v1@826.31,-110.24 J2.49
PD7: J2.48 U1.123 | length 478.5
  Top Layer w10: U1.123 415.44,-68.98 800.7,-68.98 810.77,-79.05 v1(826,-79.05)
  Bottom Layer w10: v1@826.31,-78.74 J2.48
PD8: J2.5 U1.77 | length 1387.5
  Top Layer w10: v1(-275,-244) -275,-246.62 -265.75,-255.87 U1.77
  Bottom Layer w10: v1(-275,-244) -275,-246.62 -265.75,-255.87 -265.75,-380.45 -168.3,-477.9 339.3,-477.9 486.49,-330.71 J2.5
PD9: J2.6 U1.78 | length 1413.5
  Top Layer w10: v1(-255,-217) -255,-219.62 -246.06,-228.56 U1.78
  Bottom Layer w10: v1(-255,-217) -255,-219.62 -246.06,-228.56 -246.06,-372.29 -160.15,-458.21 331.15,-458.21 490.14,-299.21 J2.6
PD10: J2.7 U1.79 | length 1439.5
  Top Layer w10: v1(-235,-190) -235,-192.62 -226.38,-201.24 U1.79
  Bottom Layer w10: v1(-235,-190) -235,-192.62 -226.38,-201.24 -226.38,-364.14 -151.99,-438.52 322.99,-438.52 493.8,-267.72 J2.7
PD11: J2.8 U1.80 | length 1468.4
  Top Layer w10: v1(-216,-162) -216,-164.62 -206.69,-173.93 U1.80
  Bottom Layer w10: v1(-216,-162) -216,-164.62 -206.69,-173.93 -206.69,-355.98 -143.84,-418.84 314.84,-418.84 497.46,-236.22 J2.8
PD12: J2.9 U1.81 | length 1494.4
  Top Layer w10: v1(-196,-135) -196,-137.62 -187.01,-146.61 U1.81
  Bottom Layer w10: v1(-196,-135) -196,-137.62 -187.01,-146.61 -187.01,-347.83 -135.68,-399.15 306.68,-399.15 501.11,-204.72 J2.9
PD13: J2.10 U1.82 | length 1523.2
  Top Layer w10: v1(-177,-107) -177,-109.62 -167.32,-119.3 U1.82
  Bottom Layer w10: v1(-177,-107) -177,-109.62 -167.32,-119.3 -167.32,-339.68 -127.53,-379.47 298.53,-379.47 504.77,-173.23 J2.10
PD14: J2.11 U1.85 | length 972.1
  Top Layer w10: v1@-116.78,-356.7 -108.27,-365.21 U1.85
  Bottom Layer w10: v1(-116.78,-354.51) 295.42,-354.51 508.2,-141.73 J2.11
PD15: J2.12 U1.86 | length 985.5
  Top Layer w10: v1(-97.78,-326.51) -97.78,-329.13 -88.58,-338.33 U1.86 U1.86@-88.58,-415.87
  Bottom Layer w10: v1(-97.78,-326.51) 295.7,-326.51 511.98,-110.24 J2.12
PE0: J2.33 U1.141 | length 519.1
  Top Layer w10: U1.141 415.44,285.52 652.24,285.52 755.27,388.55 818.54,388.55 823.38,393.39 v1(826,393.39)
  Bottom Layer w10: v1@826.31,393.7 J2.33
PE1: C25.2 J2.32 SW2.1 U1.142 | length 784.6
  Top Layer w10: U1.142 644.12,305.12 762.04,423.04 ; SW2.1@692.32,601.69 692.32,438.31 692.32,430.8 700.12,423 769.1,423 C25.2 ; C25.2@769.1,423.04 824.15,423.04 v1(826,424.89)
  Bottom Layer w10: v1@826.31,425.2 J2.32
PE2: J1.31 U1.1 | length 1248.6
  Top Layer w10: v1(330,490) 330,487.38 344.49,472.89 U1.1
  Bottom Layer w10: J1.31 -632.53,456.69 -455.34,633.89 135.99,633.89 144.88,625 145,625 280,490 v1(330,490)
PE3: J1.32 U1.2 | length 1372.7
  Top Layer w10: U1.2 324.8,337.82 v1(334,328.62)
  Bottom Layer w10: J1.32 -636.31,425.2 -447.22,614.28 127.88,614.28 324.8,417.36 324.8,337.82 v1(334,328.62)
PE4: J1.33 U1.3 | length 1404.1
  Top Layer w10: U1.3 305.12,310.5 314,301.62 v1(314,299)
  Bottom Layer w10: J1.33 -640.09,393.7 -439.1,594.68 119.64,594.68 305.12,409.2 305.12,310.5 314,301.62 v1(314,299)
PE5: J1.34 U1.4 | length 1430.2
  Top Layer w10: U1.4 285.43,283.19 294,274.62 v1(294,272)
  Bottom Layer w10: J1.34 -643.87,362.2 -430.99,575.08 111.4,575.08 285.43,401.05 285.43,283.19 294,274.62 v1(294,272)
PE6: J1.35 U1.5 | length 1459.1
  Top Layer w10: U1.5 265.75,255.87 275,246.62 v1(275,244)
  Bottom Layer w10: J1.35 -647.64,330.71 -422.87,555.49 103.16,555.49 265.75,392.9 265.75,255.87 275,246.62 v1(275,244)
PE7: J1.11 U1.58 | length 504.4
  Top Layer w10: v1(-826,-141.43) -736.86,-141.43 -664.5,-69.07 -445.72,-69.07 -445.55,-68.9 U1.58
  Bottom Layer w10: J1.11 v1@-826.31,-141.73
PE8: J1.10 U1.59 | length 509.3
  Top Layer w10: v1(-826,-172.92) -740.64,-172.92 -656.39,-88.67 -415.44,-88.67 U1.59
  Bottom Layer w10: J1.10 v1@-826.31,-173.23
PE9: J1.9 U1.60 | length 514.2
  Top Layer w10: v1(-826,-204.42) -823.38,-204.42 -813.96,-195 -735,-195 -648.27,-108.27 U1.60
  Bottom Layer w10: J1.9 v1@-826.31,-204.72
PE10: J1.8 U1.63 | length 518.6
  Top Layer w10: v1(-826,-235.91) -824.39,-237.52 -812.48,-237.52 -795,-255 -724.03,-255 -636.44,-167.41 -415.44,-167.41 U1.63
  Bottom Layer w10: J1.8 v1@-826.31,-236.22
PE11: J1.7 U1.64 | length 513.9
  Top Layer w10: v1(-826,-267.41) -823.38,-267.41 -815.79,-275 -716.31,-275 -628.49,-187.18 -445.72,-187.18 -445.55,-187.01 U1.64
  Bottom Layer w10: J1.7 v1@-826.31,-267.72
PE12: J1.6 U1.65 | length 512.5
  Top Layer w10: v1(-826,-298.91) -712.5,-298.91 -620.37,-206.78 -415.44,-206.78 U1.65
  Bottom Layer w10: J1.6 v1@-826.31,-299.21
PE13: J1.5 U1.66 | length 517.4
  Top Layer w10: v1(-826,-330.4) -716.28,-330.4 -612.42,-226.55 -445.72,-226.55 -445.55,-226.38 U1.66
  Bottom Layer w10: J1.5 v1@-826.31,-330.71
PE14: J1.4 U1.67 | length 522.3
  Top Layer w10: v1(-826,-361.9) -720.05,-361.9 -604.3,-246.15 U1.67 U1.67
  Bottom Layer w10: J1.4 v1@-826.31,-362.2
PE15: J1.3 U1.68 | length 527.2
  Top Layer w10: v1(-826,-393.39) -723.83,-393.39 -596.36,-265.92 -445.72,-265.92 -445.55,-265.75 U1.68
  Bottom Layer w10: J1.3 v1@-826.31,-393.7
PF0: J1.39 U1.10 | length 1283.7
  Top Layer w10: U1.10 167.32,283.19 175.89,274.62 v1(175.89,272)
  Bottom Layer w10: J1.39 -662.75,204.72 -390.39,477.08 70.11,477.08 167.32,379.87 167.32,283.19 175.89,274.62 v1(175.89,272)
PF1: J1.40 U1.11 | length 1312.6
  Top Layer w10: U1.11 147.64,255.87 156.89,246.62 v1(156.89,244)
  Bottom Layer w10: J1.40 -704.06,174.13 -665.63,174.13 -382.27,457.49 61.87,457.49 147.64,371.72 147.64,255.87 156.89,246.62 v1(156.89,244)
PF2: J1.41 U1.12 | length 1338.5
  Top Layer w10: U1.12 127.95,228.56 136.89,219.62 v1(136.89,217)
  Bottom Layer w10: J1.41 -704.06,142.64 -669.4,142.64 -374.16,437.89 53.39,437.89 127.95,363.32 127.95,228.56 136.89,219.62 v1(136.89,217)
PF3: J1.42 U1.13 | length 1393.4
  Top Layer w10: U1.13 108.27,201.24 116.89,192.62 v1(116.89,190)
  Bottom Layer w10: J1.42 -704.06,111.14 -624.26,111.14 -618.4,117 -618.4,165.92 -366.04,418.28 45.27,418.28 108.27,355.29 108.27,201.24 116.89,192.62 v1(116.89,190)
PF4: J1.43 U1.14 | length 1425.8
  Top Layer w10: U1.14 88.58,173.93 97.89,164.62 v1(97.89,162)
  Bottom Layer w10: J1.43 -704.06,79.65 -622.23,79.65 -598.8,103.07 -598.8,157.8 -358,398.6 -303.27,398.6 -303.19,398.68 37.15,398.68 88.58,347.26 88.58,173.93 97.89,164.62 v1(97.89,162)
PF5: J1.44 U1.15 | length 1451.8
  Top Layer w10: U1.15 68.9,146.61 77.89,137.62 v1(77.89,135)
  Bottom Layer w10: J1.44 -626.91,47.24 -579.2,94.96 -579.2,149.69 -349.89,379 29,379 68.9,339.1 68.9,146.61 77.89,137.62 v1(77.89,135)
PF6: J1.45 U1.18 | length 960.4
  Top Layer w10: U1.18@9.84,414.84 9.84,364.7 18.35,356.19 v1(18.35,354)
  Bottom Layer w10: J1.45 -630.69,15.75 -559.6,86.84 -559.6,141.57 -348.17,353 v1@19.35,353
PF7: J1.46 U1.19 | length 971.1
  Top Layer w10: U1.19 -9.84,337.82 -0.65,328.62 v1(-0.65,326)
  Bottom Layer w10: J1.46 -634.47,-15.75 -540,78.72 -540,133.45 -347.45,326 v1(-0.65,326)
PF8: J1.47 U1.20 | length 980.4
  Top Layer w10: U1.20 -29.53,310.5 -20.65,301.62 v1(-20.65,299)
  Bottom Layer w10: J1.47 -638.24,-47.24 -520.4,70.6 -520.4,125.33 -347.73,298 v1@-19.65,298
PF9: J1.48 U1.21 | length 989.1
  Top Layer w10: U1.21 -49.21,283.19 -40.65,274.62 v1(-40.65,272)
  Bottom Layer w10: J1.48 -642.02,-78.74 -500.8,62.48 -500.8,117.21 -347.01,271 v1@-39.65,271
PF10: J1.49 U1.22 | length 1000.2
  Top Layer w10: U1.22 -68.9,255.87 -59.65,246.62 v1(-59.65,244)
  Bottom Layer w10: J1.49 -644.24,-110.24 -481.2,52.8 -481.2,109.09 -346.29,244 v1(-59.65,244)
PF11: J1.18 U1.49 | length 486.4
  Top Layer w10: v1(-826,79.05) -824.15,80.9 -814.1,80.9 -786.73,108.27 U1.49
  Bottom Layer w10: J1.18 v1@-826.31,78.74
PF12: J1.17 U1.50 | length 491.3
  Top Layer w10: v1(-826,47.55) -824.15,49.4 -815.6,49.4 -776.42,88.58 U1.50
  Bottom Layer w10: J1.17 v1@-826.31,47.24
PF13: J1.16 U1.53 | length 489
  Top Layer w10: v1(-826,16.05) -824.15,14.2 -814.2,14.2 -805,5 -729.03,5 -704.59,29.44 U1.53@-415.44,29.44
  Bottom Layer w10: J1.16 v1@-826.31,15.75
PF14: J1.15 U1.54 | length 484.8
  Top Layer w10: v1(-826,-15.44) -721.75,-15.44 -696.64,9.67 -445.72,9.67 -445.55,9.84 U1.54
  Bottom Layer w10: J1.15 v1@-826.31,-15.75
PF15: J1.14 U1.55 | length 489.7
  Top Layer w10: v1(-826,-46.94) -725.53,-46.94 -688.52,-9.93 -415.44,-9.93 U1.55
  Bottom Layer w10: J1.14 v1@-826.31,-47.24
PG0: J1.13 U1.56 | length 494.6
  Top Layer w10: v1(-826,-78.43) -729.31,-78.43 -680.57,-29.7 -445.72,-29.7 -445.55,-29.53 U1.56
  Bottom Layer w10: J1.13 v1@-826.31,-78.74
PG1: J1.12 U1.57 | length 499.5
  Top Layer w10: v1(-826,-109.93) -824.15,-108.08 -731.23,-108.08 -672.45,-49.3 -415.44,-49.3 U1.57
  Bottom Layer w10: J1.12 v1@-826.31,-110.24
PG2: J2.13 U1.87 | length 994.2
  Top Layer w10: v1(-77.78,-299.51) -77.78,-302.13 -68.9,-311.01 U1.87@-68.9,-415.87
  Bottom Layer w10: v1(-77.78,-299.51) 294.98,-299.51 515.75,-78.74 J2.13
PG3: J2.14 U1.88 | length 1003
  Top Layer w10: v1(-57.78,-272.51) -57.78,-275.13 -49.21,-283.7 U1.88 U1.88@-49.21,-415.87
  Bottom Layer w10: v1(-57.78,-272.51) 294.26,-272.51 519.53,-47.24 J2.14
PG4: J2.15 U1.89 | length 1013.7
  Top Layer w10: v1(-38.78,-244.51) -38.78,-247.13 -29.53,-256.38 U1.89 U1.89@-29.53,-415.87
  Bottom Layer w10: v1(-38.78,-244.51) 294.55,-244.51 523.31,-15.75 J2.15
PG5: J2.16 U1.90 | length 1022.4
  Top Layer w10: v1(-18.78,-217.51) -18.78,-220.13 -9.84,-229.07 U1.90@-9.84,-415.87
  Bottom Layer w10: v1(-18.78,-217.51) 293.83,-217.51 527.09,15.75 J2.16
PG6: J2.17 U1.91 | length 1031.1
  Top Layer w10: v1(1.22,-190.51) 1.22,-193.13 9.84,-201.75 U1.91 U1.91@9.84,-415.87
  Bottom Layer w10: v1(1.22,-190.51) 293.11,-190.51 530.86,47.24 J2.17
PG7: J2.18 U1.92 | length 1041.9
  Top Layer w10: v1(20.22,-162.51) 20.22,-165.13 29.53,-174.44 U1.92@29.53,-415.87
  Bottom Layer w10: v1(20.22,-162.51) 293.39,-162.51 534.64,78.74 J2.18
PG8: J2.19 U1.93 | length 1050.8
  Top Layer w10: v1(40.22,-135.51) 40.22,-138.13 49.21,-147.12 U1.93 U1.93@49.21,-415.87
  Bottom Layer w10: v1(40.22,-135.51) 292.67,-135.51 538.61,110.43 704.77,110.43 J2.19
PG9: J2.47 U1.124 | length 475
  Top Layer w10: U1.124 415.7,-48.87 824.68,-48.87 v1(826,-47.55)
  Bottom Layer w10: v1@826.31,-47.24 J2.47
PG10: J2.46 U1.125 | length 479.9
  Top Layer w10: U1.125 808.89,-29.53 820.51,-17.91 824.15,-17.91 v1(826,-16.06)
  Bottom Layer w10: v1@826.31,-15.75 J2.46
PG11: J2.45 U1.126 | length 484.8
  Top Layer w10: U1.126 792.16,-9.84 815.59,13.59 824.15,13.59 v1(826,15.44)
  Bottom Layer w10: v1@826.31,15.75 J2.45
PG12: J2.44 U1.127 | length 489.7
  Top Layer w10: U1.127 780.84,9.84 816.08,45.08 824.15,45.08 v1(826,46.94)
  Bottom Layer w10: v1@826.31,47.24 J2.44
PG13: J2.43 U1.128 | length 494.6
  Top Layer w10: U1.128 768.53,29.53 815.58,76.58 824.15,76.58 v1(826,78.43)
  Bottom Layer w10: v1@826.31,78.74 J2.43
PG14: J2.42 U1.129 | length 499.5
  Top Layer w10: U1.129 757.21,49.21 816.08,108.08 824.15,108.08 v1(826,109.93)
  Bottom Layer w10: v1@826.31,110.24 J2.42
PG15: J2.41 U1.132 | length 488.1
  Top Layer w10: U1.132 415.44,108.35 696.82,108.35 729.89,141.43 v1(826,141.43)
  Bottom Layer w10: v1@826.31,141.73 J2.41
VBUS: C4.2 C5.2 C23.2 C24.2 D4.2 IC1.3 J1.59 J1.60 P2.1 TP1.1 | length 1667.5
  Top Layer w18: v2(-725,-510) -725,-555 -799,-629 -799,-685.12 C4.2 -799,-697.12 -799,-759 C5.2 -799,-771 -799,-806 -781.75,-823.25 IC1.3 -693.26,-835.86 -664.14,-835.86 -656.29,-843.71 -351.29,-843.71 C24.2 -338.71,-843.71 -276.29,-843.71 C23.2 -263.71,-843.71 -191,-843.71 TP1.1 -155.91,-808.62 -155.91,-775.91 -140,-760 -80,-760 -57.44,-737.44 -57.44,-712.58 -22.14,-677.29 D4.2 20.29,-642 206.27,-642 216.82,-652.55 P2.1
  Bottom Layer w10: J1.59@-726,-426.1 -725.09,-425.2 J1.59 ; J1.60@-725,-456.69 J1.60
  Bottom Layer w18: v2(-725,-510) -725,-456.69 J1.59@-725,-429
VCC_3V3: C6.2 C7.2 C10.2 C11.2 C12.2 C13.2 C14.2 C15.2 C16.2 C17.2 C19.2 C20.2 C21.2 C22.2 FB1.1 IC1.2 J1.57 J1.58 P1.4 R2.1 R3.2 TP2.1 U1.6 U1.17 U1.30 U1.39 U1.52 U1.62 U1.72 U1.84 U1.95 U1.108 U1.121 U1.131 U1.144 | length 8101.1
  Top Layer w6: U1.62@-415.01,-147.98 -372.02,-147.98 -365,-155 ; U1.72@-384.99,-344.14 -375.45,-344.14 -365,-333.7 -365,-155 ; -365,50 -364.21,49.21 -363,48 -363,-49 -321,-91 -321,-111 ; U1.30 -226.38,126.38 -205,105 -205,5 ; U1.121 364.27,-108.27 321,-65 321,126 266.79,180.21 266.79,198.11 254.35,210.54 ; U1.131 367.51,88.58 364,92.1 364,166.58 320.03,210.54 254.35,210.54 ; U1.144 435.45,344.49 U1.144@438.14,347.17 ; v1@438.14,388.14 v1(440,390) ; -365,-155 -321,-111 ; -321,-111 -265.75,-55.75 -205,5 ; -205,5 -36.42,5 ccw(c-36.42,105) 34.29,34.29 95,95 v1(210,210) 210.54,210.54 254.35,210.54
  Top Layer w10: C10.2 -503.95,-344.49 U1.72 -385.34,-344.49 U1.72@-384.99,-344.14 ; C17.2@-513.74,-137.85 -503.95,-147.64 U1.62 U1.62@-415.01,-147.98 ; C16.2 -503.95,49.21 U1.52 -364.21,49.21 -345.79,49.21 -330,65 -330,280 -355,305 -415.24,305 U1.39 -503.95,305.12 C22.2@-513.74,314.91 ; C7.2@-468,-556.09 -468,-585 -420,-633 R3.2@-354.78,-633 ; FB1.1 -205.86,549.17 -200,543.32 -200,490 -226.38,463.62 U1.30 ; C19.2 U1.84 ; v1@-70.55,-594.45 v1(-70,-595) ; TP2.1 -70,-811.36 -25,-766.36 v1(-25,-765) ; U1.17 C11.2 C12.2 U1.6 ; C20.2 U1.95 ; C12.2@247.05,513.74 298.74,513.74 v1(330,545) 370.35,585.35 379.25,585.35 R2.1 ; U1.108 344.49,-434.16 345.32,-435 508.9,-435 C21.2@508.9,-439.17 ; U1.144@390,345.32 390.84,344.49 U1.144 ; U1.121 503.95,-108.27 C15.2@513.74,-118.06 ; U1.131 503.95,88.58 C14.2@513.74,78.8 ; U1.144@435.45,344.49 503.95,344.49 C13.2 513.74,376.26 500,390 v1(440,390)
  Top Layer w15: C10.2 -513.74,-451.26 v2(-475,-490) -375,-490 -351.26,-513.74 C19.2 -70.55,-513.74 ; C7.2 C7.2@-468,-556.09 ; R3.2@-351.78,-636 R3.2 ; v1@-70.55,-594.45 -70.55,-513.74 ; C20.2 -70.55,-513.74 ; C21.2 513.74,-481.83 P1.4
  Top Layer w20: IC1.2 -695.17,-721.99 -661.99,-721.99 -554.65,-614.65 -554.65,-553.73 C6.2 C7.2 ; C7.2@-475,-546.88 v2(-475,-490)
  Bottom Layer w6: v1(210,210) 295.07,210 315,229.93 315,250 440,375 v1(440,390) 440,435 v1(330,545)
  Bottom Layer w10: J1.58 -571.3,-393.7 -602.8,-362.2 J1.57
  Bottom Layer w15: v1(-70,-595) -70,-635 -25,-680 ; v1(-25,-765) -25,-680 ; P1.4 421.91,-680 -25,-680
  Bottom Layer w20: -571.3,-393.7 v2(-475,-490)
VDDA_3V3: C8.2 C9.2 FB1.2 U1.32 U1.33 | length 303.8
  Top Layer w8: -301.17,481.17 -276.17,481.17 -265.75,470.75 U1.32
  Top Layer w10: C9.2 C9.2@-322.74,513.74 ; U1.33 -285.43,465.43 -301.17,481.17 -316.9,496.9 -316.9,507.9 C9.2@-322.74,513.74 ; FB1.2 C8.2 C9.2@-322.74,513.74
pads on no net: IC1.4 P2.4

## Polygon pours and split planes (outlines as drawn)
GND on Bottom Layer "NONET_L01_P-001" (hatched 45Degree grid 20 track 8, pour order 7): 940,-752.2 cw(c802.21,-752.21) 802.2,-890 -802.2,-890 cw(c-802.21,-752.21) -940,-752.2 -940,517.2 cw(c-802.2,517.2) -802.2,655 802.2,655 cw(c802.21,517.21) 940,517.2 940,-429
GND on Top Layer "NONET_L01_P-001" (hatched 45Degree grid 20 track 8, pour order 3): 940,-752.2 cw(c802.21,-752.21) 802.2,-890 -802.2,-890 cw(c-802.21,-752.21) -940,-752.2 -940,517.2 cw(c-802.2,517.2) -802.2,655 802.2,655 cw(c802.21,517.21) 940,517.2 940,-429
GND on GND2 (split plane): 825.22,632.89 840.12,628.9 854.37,622.99 867.73,615.28 879.98,605.88 890.89,594.97 900.28,582.73 907.99,569.37 913.9,555.12 917.89,540.22 919.9,524.92 919.9,517.2 919.9,-752.2 919.9,-759.92 917.89,-775.22 913.9,-790.12 907.99,-804.37 900.28,-817.73 890.89,-829.97 879.98,-840.89 867.73,-850.28 854.37,-857.99 840.12,-863.9 825.22,-867.89 809.92,-869.9 -809.92,-869.9 -825.22,-867.89 -840.12,-863.9 -854.37,-857.99 -867.73,-850.28 -879.97,-840.89 -890.89,-829.98 -900.28,-817.73 -907.99,-804.37 -913.9,-790.12 -917.89,-775.22 -919.9,-759.92 -919.9,-752.2 -919.9,517.2 -919.9,524.92 -917.89,540.22 -913.9,555.12 -907.99,569.37 -900.28,582.73 -890.89,594.98 -879.97,605.89 -867.73,615.28 -854.37,622.99 -840.12,628.9 -825.22,632.89 -809.92,634.9 809.92,634.9
GND on GND1 (split plane): 825.22,632.89 840.12,628.9 854.37,622.99 867.73,615.28 879.98,605.88 890.89,594.97 900.28,582.73 907.99,569.37 913.9,555.12 917.89,540.22 919.9,524.92 919.9,517.2 919.9,-752.2 919.9,-759.92 917.89,-775.22 913.9,-790.12 907.99,-804.37 900.28,-817.73 890.89,-829.97 879.98,-840.89 867.73,-850.28 854.37,-857.99 840.12,-863.9 825.22,-867.89 809.92,-869.9 -809.92,-869.9 -825.22,-867.89 -840.12,-863.9 -854.37,-857.99 -867.73,-850.28 -879.97,-840.89 -890.89,-829.98 -900.28,-817.73 -907.99,-804.37 -913.9,-790.12 -917.89,-775.22 -919.9,-759.92 -919.9,-752.2 -919.9,517.2 -919.9,524.92 -917.89,540.22 -913.9,555.12 -907.99,569.37 -900.28,582.73 -890.89,594.98 -879.97,605.89 -867.73,615.28 -854.37,622.99 -840.12,628.9 -825.22,632.89 -809.92,634.9 809.92,634.9

## Silkscreen, mask and mechanical layers (free items; w line width, h text height)
Top Overlay:
  lines w6: -531.46,-362.15 -531.46,-346.4 ; -330.93,531.46 -315.18,531.46 ; -283.52,531.46 -267.77,531.46 ; -236.11,531.46 -220.36,531.46 ; 21.65,531.46 37.4,531.46
  lines w10: -225,-890 -225,-775 75,-775 75,-890 ; 516.91,-885 516.91,-485 715,-485 715,-670
  lines w20: -940,-752.2 ccw(c-802.2,-752.2) -802.2,-890 120,-890 802.2,-890 ccw(c802.2,-752.2) 940,-752.2 940,517.2 ccw(c802.2,517.2) 802.2,655 -802.2,655 ccw(c-802.2,517.2) -940,517.2 -940,-225 -940,-752.2
  text "RST" at -665,470.01 h30 r90
  text "RobotCtrl_Core by Power Lin" at 868.34,454.85 h35 r270
  text "BUTTON1" at 553,432.69 h26 r90
  text "Based on STM32F407ZET6" at -903.49,350.04 h35 r270
  text "V2.8" at -349.98,-538 h28
  text "3V3" at 625.01,-550 h30
  text "BETA" at -348.65,-582 h26
  text "PWR/Slave" at 465,-619 h30 r270
  text "DIO" at 625.01,-645 h30
  text "LED1" at 806.68,-653 h26
  text "CLK" at 625.01,-750 h30
  text "GND" at 625.01,-850 h30
  text "5V" at -184.99,-875 h30
  text "3V3" at -109.99,-875 h30
  text "G" at 10,-875 h30
Bottom Overlay:
  drawing of 48 lines, arcs and shapes, not listed
  text "wiki-power.com" at 244.36,-338.52 h80
Mechanical 1:
  lines w10: -940,-752.2 ccw(c-802.2,-752.2) -802.2,-890 120,-890 802.2,-890 ccw(c802.2,-752.2) 940,-752.2 940,517.2 ccw(c802.2,517.2) 802.2,655 -802.2,655 ccw(c-802.2,517.2) -940,517.2 -940,-225 -940,-752.2